# Altium PCB PCB1 (1).PcbDoc
Units mm, origin at the board's own origin, x right, y up, seen from the top; angles counter-clockwise.
Board outline 48.57 x 34.37 mm, 2 copper layers (Top Layer, Bottom Layer); 26 components, 18 nets, 71 pads, 0 vias.
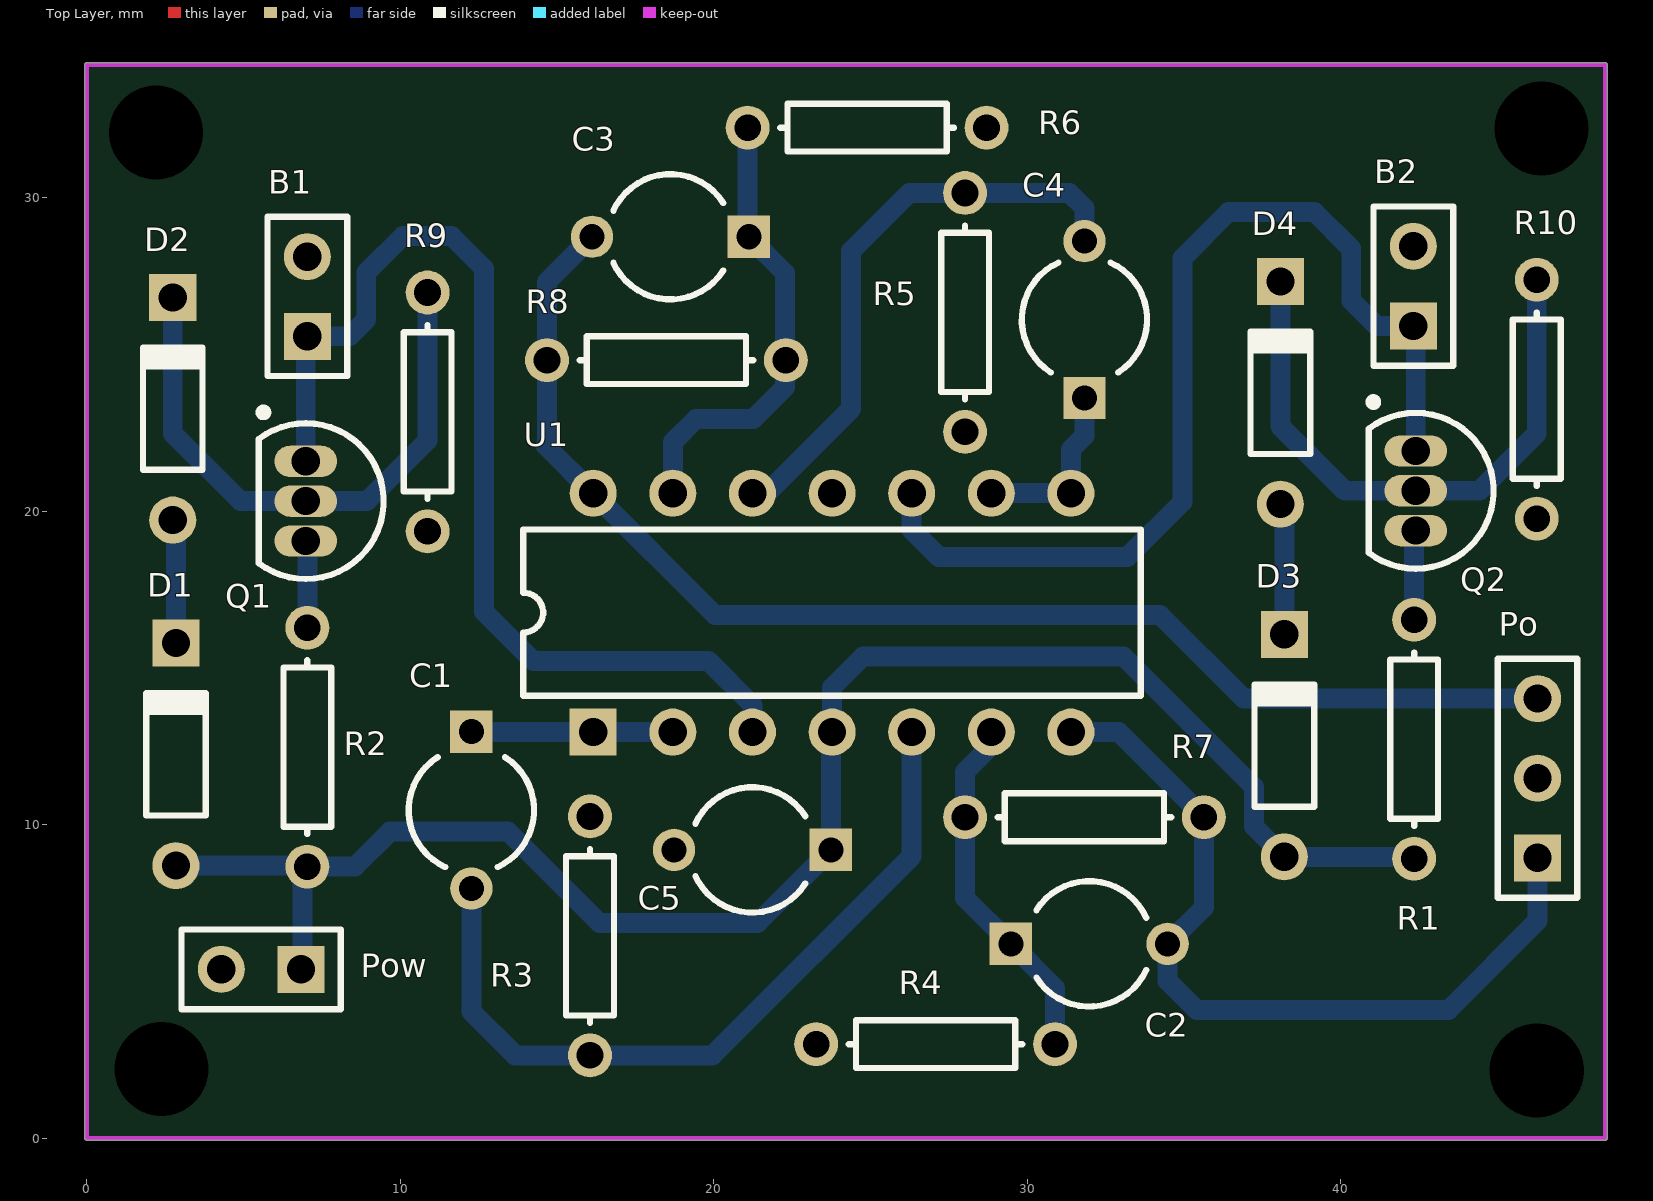
[diagram p0: Top Layer view]
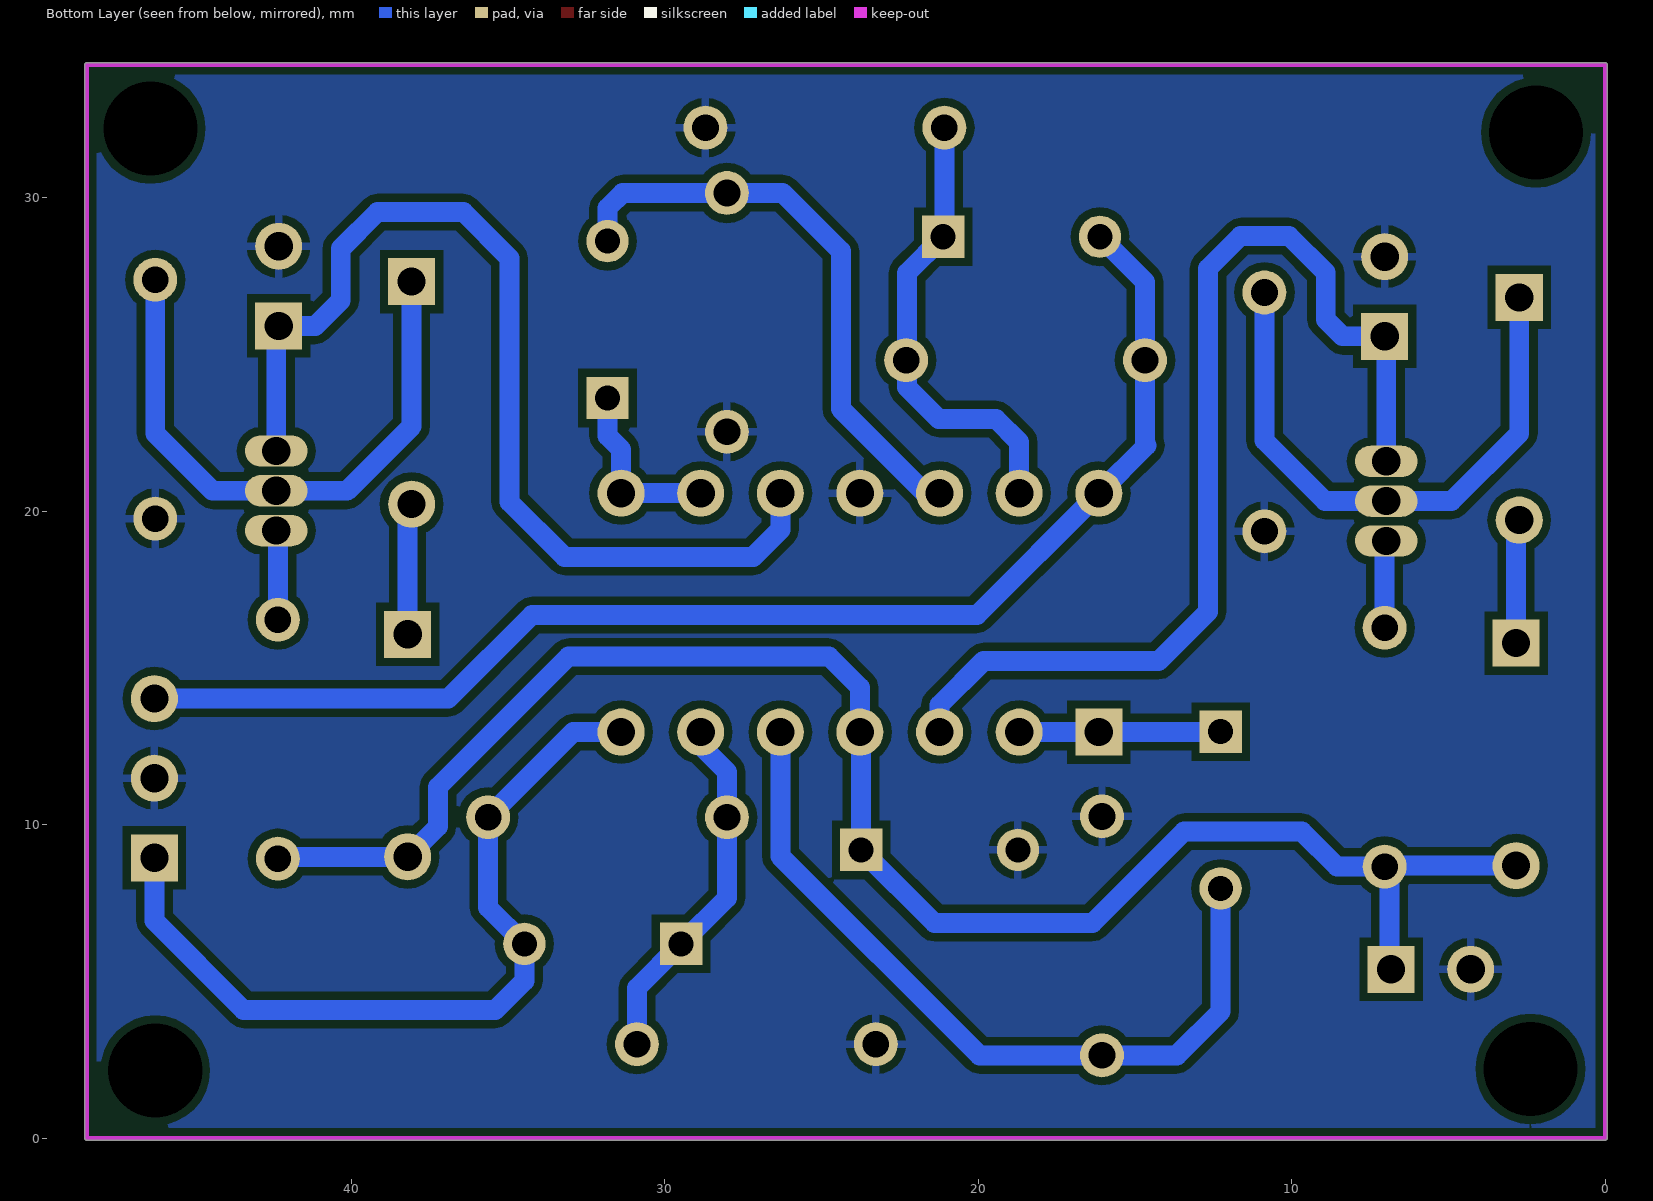
[diagram p1: Bottom Layer view, seen from below]

## Layer stack, top to bottom
Top Layer: signal copper 0.0356
Dielectric: dielectric 0.32, FR-4, Dk 4.8
Bottom Layer: signal copper 0.0356

## Board outline
-0.064,0 ccw(c0,0) 0,-0.064 48.412,-0.064 ccw(c48.412,0) 48.425,-0.063 ccw(c48.438,0) 48.502,0 48.502,34.239 ccw(c48.438,34.239) 48.438,34.303 0,34.303 ccw(c0,34.239) -0.064,34.239

## Design rules (kind name [scope] priority, off if disabled: settings)
Clearance [All] p1: gap=0.254
PolygonConnect [All] p1: connectstyle=Relief reliefconductorwidth=0.254 reliefentries=4 polygonreliefangle="90 Angle" airgapwidth=0.254
RoutingVias [All] p1: holewidth=0.711 width=1.27 viastyle="Through Hole" minholewidth=0.711 minwidth=1.27 maxholewidth=0.711 maxwidth=1.27
SolderMaskExpansion [All] p1: expansion=0.102
Width [All] p1: maxlimit=2.54 minlimit=0.254 preferedwidth=0.254
28 further rules are at their usual default settings.

## Components (designator, comment, footprint, x,y, rotation, side; value= is the part's Value field where it differs from the comment)
B1 "Header 2" HDR1X2 7.036,25.578 r90 top
B2 "Header 2" HDR1X2 42.316,25.908 r90 top
C1 "7.9uF" CAPR5-4X5 12.268,10.465 r270 top
C2 "7.9uF" CAPR5-4X5 31.979,6.198 r0 top
C3 "7.9uF" CAPR5-4X5 18.618,28.753 r180 top
C4 "7.9uF" CAPR5-4X5 31.826,26.111 r90 top
C5 "7.9uF" CAPR5-4X5 21.234,9.195 r180 top
D1 "1N4148" DO-35 2.845,12.243 r90 top
D2 "1N4148" DO-35 2.743,23.266 r90 top
D3 "1N4148" DO-35 38.202,12.522 r90 top
D4 "1N4148" DO-35 38.075,23.774 r90 top
Po "Header 3" HDR1X3 46.279,8.941 r90 top
Pow "Header 2" HDR1X2 6.833,5.385 r180 top
Q1 "2N3906" TO-92A 6.985,20.32 r180 top
Q2 "2N3906" TO-92A 42.393,20.65 r180 top
R1 "470R" AXIAL-0.3 42.342,12.725 r270 top
R2 "470R" AXIAL-0.3 7.036,12.471 r270 top
R3 "100k" AXIAL-0.3 16.053,6.452 r270 top
R4 "100k" AXIAL-0.3 27.076,2.997 r0 top
R5 "100k" AXIAL-0.3 28.016,26.34 r90 top
R6 "100k" AXIAL-0.3 24.892,32.233 r180 top
R7 "1M" AXIAL-0.3 31.826,10.236 r0 top
R8 "1M" AXIAL-0.3 18.491,24.816 r180 top
R9 "5k" AXIAL-0.3 10.871,23.165 r90 top
R10 "5k" AXIAL-0.3 46.253,23.571 r90 top
U1 "LM324AN" N014 23.774,16.764 r0 top

## Footprints (in the part's own frame and the unit in brackets; to place one, negate y for a bottom-side part, rotate by r counter-clockwise, add the part's x,y. Pads: shape width x height; smd on the part's side, far side on the other; paste and mask are expansions set on the pad)
AXIAL-0.3 [mm] "Axial Device, Thru-Hole; 2 Leads; 0.3 in Pin Spacing"
  round 1.4 hole 0.85: 1(-3.81,0) 2(3.81,0)
  silkscreen extent -2.77,-0.76 2.77,0.76
CAPR5-4X5 [mm] "Capacitor; 2 Leads"
  rect 1.35x1.35 hole 0.8: 1(-2.5,0)
  round 1.35 hole 0.8: 2(2.5,0)
  silkscreen extent -1.69,-2 1.82,2
DO-35 [mm] "Diode, Axial; Body 3.8 x 1.9 mm (LxDia. max), Lead Dia. 0.53 mm (max)"
  round 1.5 hole 0.9: 1(-3.55,0)
  rect 1.5x1.5 hole 0.9: 2(3.55,0)
  silkscreen extent -1.95,-0.95 2.05,0.95
HDR1X2 [mm] "Connector; Header; 2 Position"
  rect 1.5x1.5 hole 0.9: 1(0,0)
  round 1.5 hole 0.9: 2(2.54,0)
  silkscreen extent -1.27,-1.27 3.81,1.27
HDR1X3 [mm] "Connector; Header; 3 Position"
  rect 1.5x1.5 hole 0.9: 1(0,0)
  round 1.5 hole 0.9: 2(2.54,0) 3(5.08,0)
  silkscreen extent -1.27,-1.27 6.35,1.27
N014 [mm] "DIP; 14 Leads; Row Spacing 7.62 mm; Pitch 2.54 mm"
  rect 1.5x1.5 hole 0.9: 1(-7.62,-3.81)
  round 1.5 hole 0.9: 2(-5.08,-3.81) 3(-2.54,-3.81) 4(0,-3.81) 5(2.54,-3.81) 6(5.08,-3.81) 7(7.62,-3.81) 8(7.62,3.81) 9(5.08,3.81) 10(2.54,3.81) 11(0,3.81) 12(-2.54,3.81) 13(-5.08,3.81) 14(-7.62,3.81)
  silkscreen extent -9.85,-2.65 9.85,2.65
TO-92A [mm] "TO, Flat Index; 3 In-Line, Axial Leads; Body Dia. 4.5mm; Leads 0.51 x 0.48 mm (max)"
  oval 2x1 hole 0.9: 1(0,-1.27) 2(0,0) 3(0,1.27)
  silkscreen extent -2.48,-2.95 1.5,2.48, body extent -2.5,-2.5 1.5,2.5, height 6.86

## Part data
B1 B2 Pow: "Header, 2-Pin"
C1 C2 C3 C4 C5: library part Cap2, "Capacitor"
D1 D2 D3 D4: library part "Diode 1N4148", "High Conductance Fast Diode"
Po: "Header, 3-Pin"
Q1 Q2: "PNP General Purpose Amplifier"
R1 R2 R3 R4 R5 R6 R7 R8 R9 R10: library part Res1, "Resistor"
U1: "Quadruple Operational Amplifier"

## Free pads (board coordinates)
  round 0.4 hole 3 mask+0: 0(46.253,2.159) 1(46.406,32.207) 2(2.21,32.08) 3(2.388,2.21)

## Nets (pads, with @x,y where several pads share a name; then routed paths per layer and width w, separated by ;. In a path a pad name is that pad's centre, name@x,y a point inside that pad or via, vN(x,y) a via of type N, cw(c..) or ccw(c..) an arc to the next point about the centre after c; other vN are vias at no path point)
GND: B1.2 B2.2 C5.2 Po.2 Pow.2 R3.1 R4.1 R5.1 R6.1 R9.1 R10.1 U1.11
NetB1_1: B1.1 Q1.1 U1.3 | length 33.8
  Bottom Layer w0.635: Q1.1 B1.1@6.985,25.527 ; B1.1 8.382,25.578 8.915,26.111 8.915,27.61 10.084,28.778 11.633,28.778 12.675,27.737 12.675,16.789 14.249,15.215 19.837,15.215 21.234,13.818 U1.3
NetB2_1: B2.1 Q2.1 U1.10 | length 33
  Bottom Layer w0.635: U1.10 26.314,19.406 27.178,18.542 33.198,18.542 34.95,20.295 34.95,28.067 36.424,29.54 39.167,29.54 40.335,28.372 40.335,26.721 41.148,25.908 B2.1 ; Q2.1 B2.1@42.393,25.832
NetC1_1: C1.1 U1.1 U1.2 | length 6.4
  Bottom Layer w0.635: C1.1@12.279,12.954 U1.1 U1.2
NetC1_2: C1.2 R3.2 U1.5 | length 25.1
  Bottom Layer w0.635: C1.2 12.268,4.039 13.665,2.642 R3.2 19.964,2.642 26.314,8.992 U1.5
NetC2_1: C2.1 R4.2 R7.1 U1.6 | length 11.5
  Bottom Layer w0.635: U1.6 28.854,12.522 28.016,11.684 R7.1 28.016,7.66 C2.1 30.886,4.79 R4.2
NetC2_2: C2.2 Po.1 R7.2 U1.7 | length 26.4
  Bottom Layer w0.635: U1.7 32.918,12.954 R7.2 35.636,7.355 C2.2 34.479,5.018 35.408,4.089 43.434,4.089 46.279,6.934 Po.1
NetC3_1: C3.1 R6.2 R8.1 U1.13 | length 14.7
  Bottom Layer w0.635: U1.13 18.694,22.2 19.431,22.936 21.26,22.936 22.276,23.952 22.276,27.595 C3.1 21.082,28.789 R6.2
NetC3_2: C3.2 Po.3 R8.2 U1.14 | length 42.3
  Bottom Layer w0.635: C3.2 14.681,27.316 R8.2 14.681,22.149 14.63,22.098 U1.14 20.041,16.688 34.239,16.688 36.906,14.021 Po.3
NetC4_1: C4.1 U1.8 U1.9 | length 5.8
  Bottom Layer w0.635: U1.9 U1.8 31.394,21.971 31.826,22.403 C4.1
NetC4_2: C4.2 R5.2 U1.12 | length 18.8
  Bottom Layer w0.635: U1.12 21.692,20.574 24.384,23.266 24.384,28.296 26.238,30.15 R5.2 31.344,30.15 31.826,29.667 C4.2
NetD1_2: D1.2 D2.1 | length 3.8
  Bottom Layer w0.635: D1.2 D2.1@2.845,19.615
NetD2_2: D2.2 Q1.2 R9.2 | length 18.9
  Bottom Layer w0.635: D2.2 2.743,22.479 4.902,20.32 7.112,20.32 8.941,20.32 10.871,22.25 R9.2
NetD3_2: D3.2 D4.1 | length 4.2
  Bottom Layer w0.635: D4.1 38.202,20.097 D3.2
NetD4_2: D4.2 Q2.2 R10.2 | length 19.3
  Bottom Layer w0.635: D4.2 38.075,22.708 40.132,20.65 Q2.2 44.425,20.65 46.253,22.479 R10.2
NetQ1_1: Q1.3 R2.1 | length 2.7
  Bottom Layer w0.635: R2.1 Q1.3@7.036,18.999
NetQ2_1: Q2.3 R1.1 | length 2.8
  Bottom Layer w0.635: R1.1 Q2.3@42.342,19.329
VCC: C5.1 D1.1 D3.1 Pow.1 R1.2 R2.2 U1.4 | length 54.1
  Bottom Layer w0.635: D1.1 R2.2@7.004,8.693 ; Pow.1@6.883,5.385 R2.2@6.883,8.509 ; R2.2 8.56,8.661 9.677,9.779 13.437,9.779 16.358,6.858 21.398,6.858 C5.1 U1.4@23.734,12.914 ; U1.4 23.774,14.376 24.765,15.367 33.071,15.367 37.236,11.201 37.236,9.937 D3.1 R1.2@42.285,8.972

## Polygon pours and split planes (outlines as drawn)
GND on Bottom Layer "GND" (solid, remove dead copper, pour order 2): -0.813,35.052 -0.559,34.798 48.971,34.798 48.971,-0.483 48.895,-0.559 48.819,-0.483 -0.813,-0.483

## Keep-outs
Keep-Out Layer:
  lines w0.127: 48.412,0 0,0 0,34.239 48.438,34.239 48.438,0